# EAGLE board logic_1.0 (EAGLE 9.5.2)
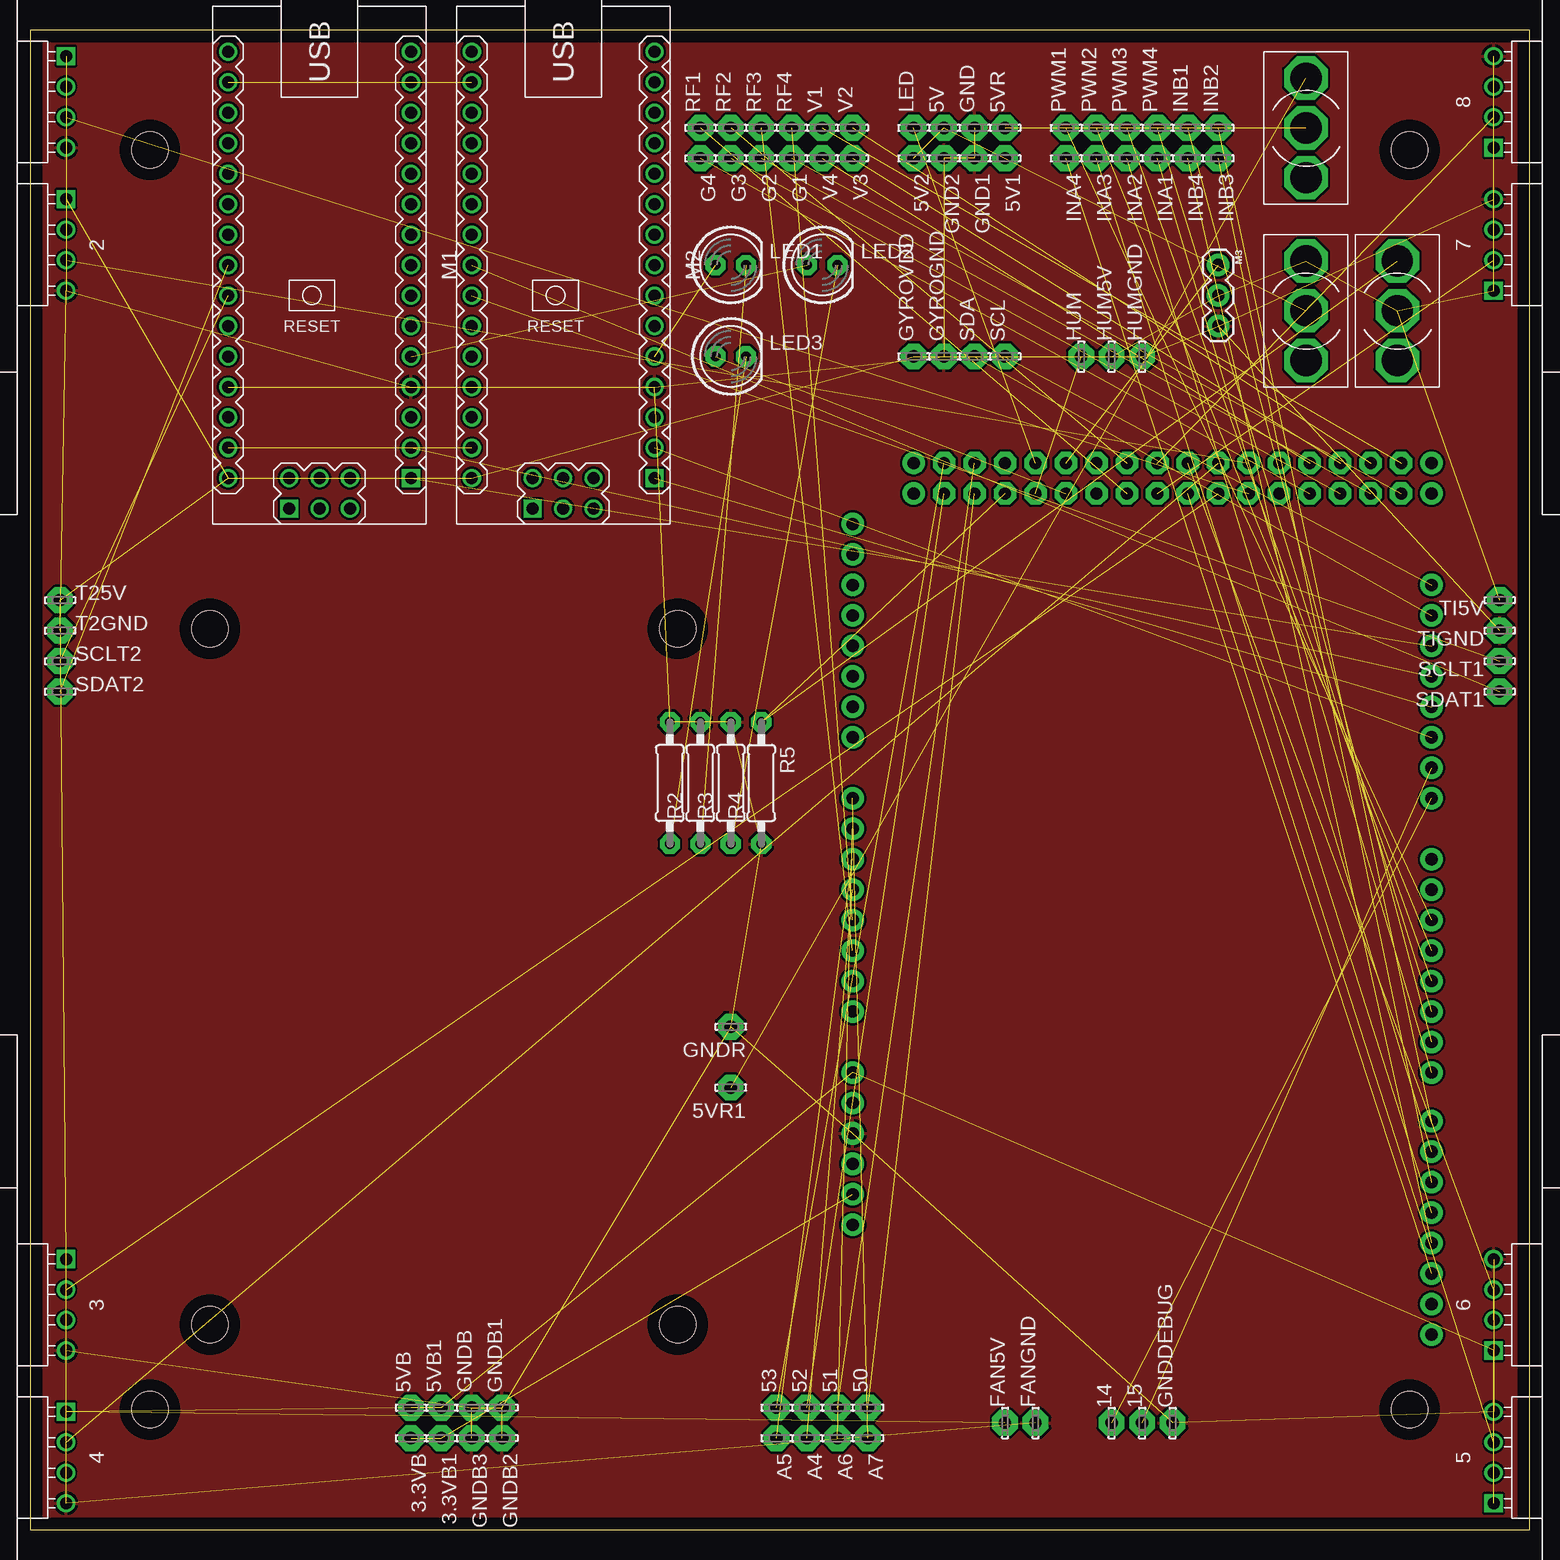
[diagram p0: board, top side]
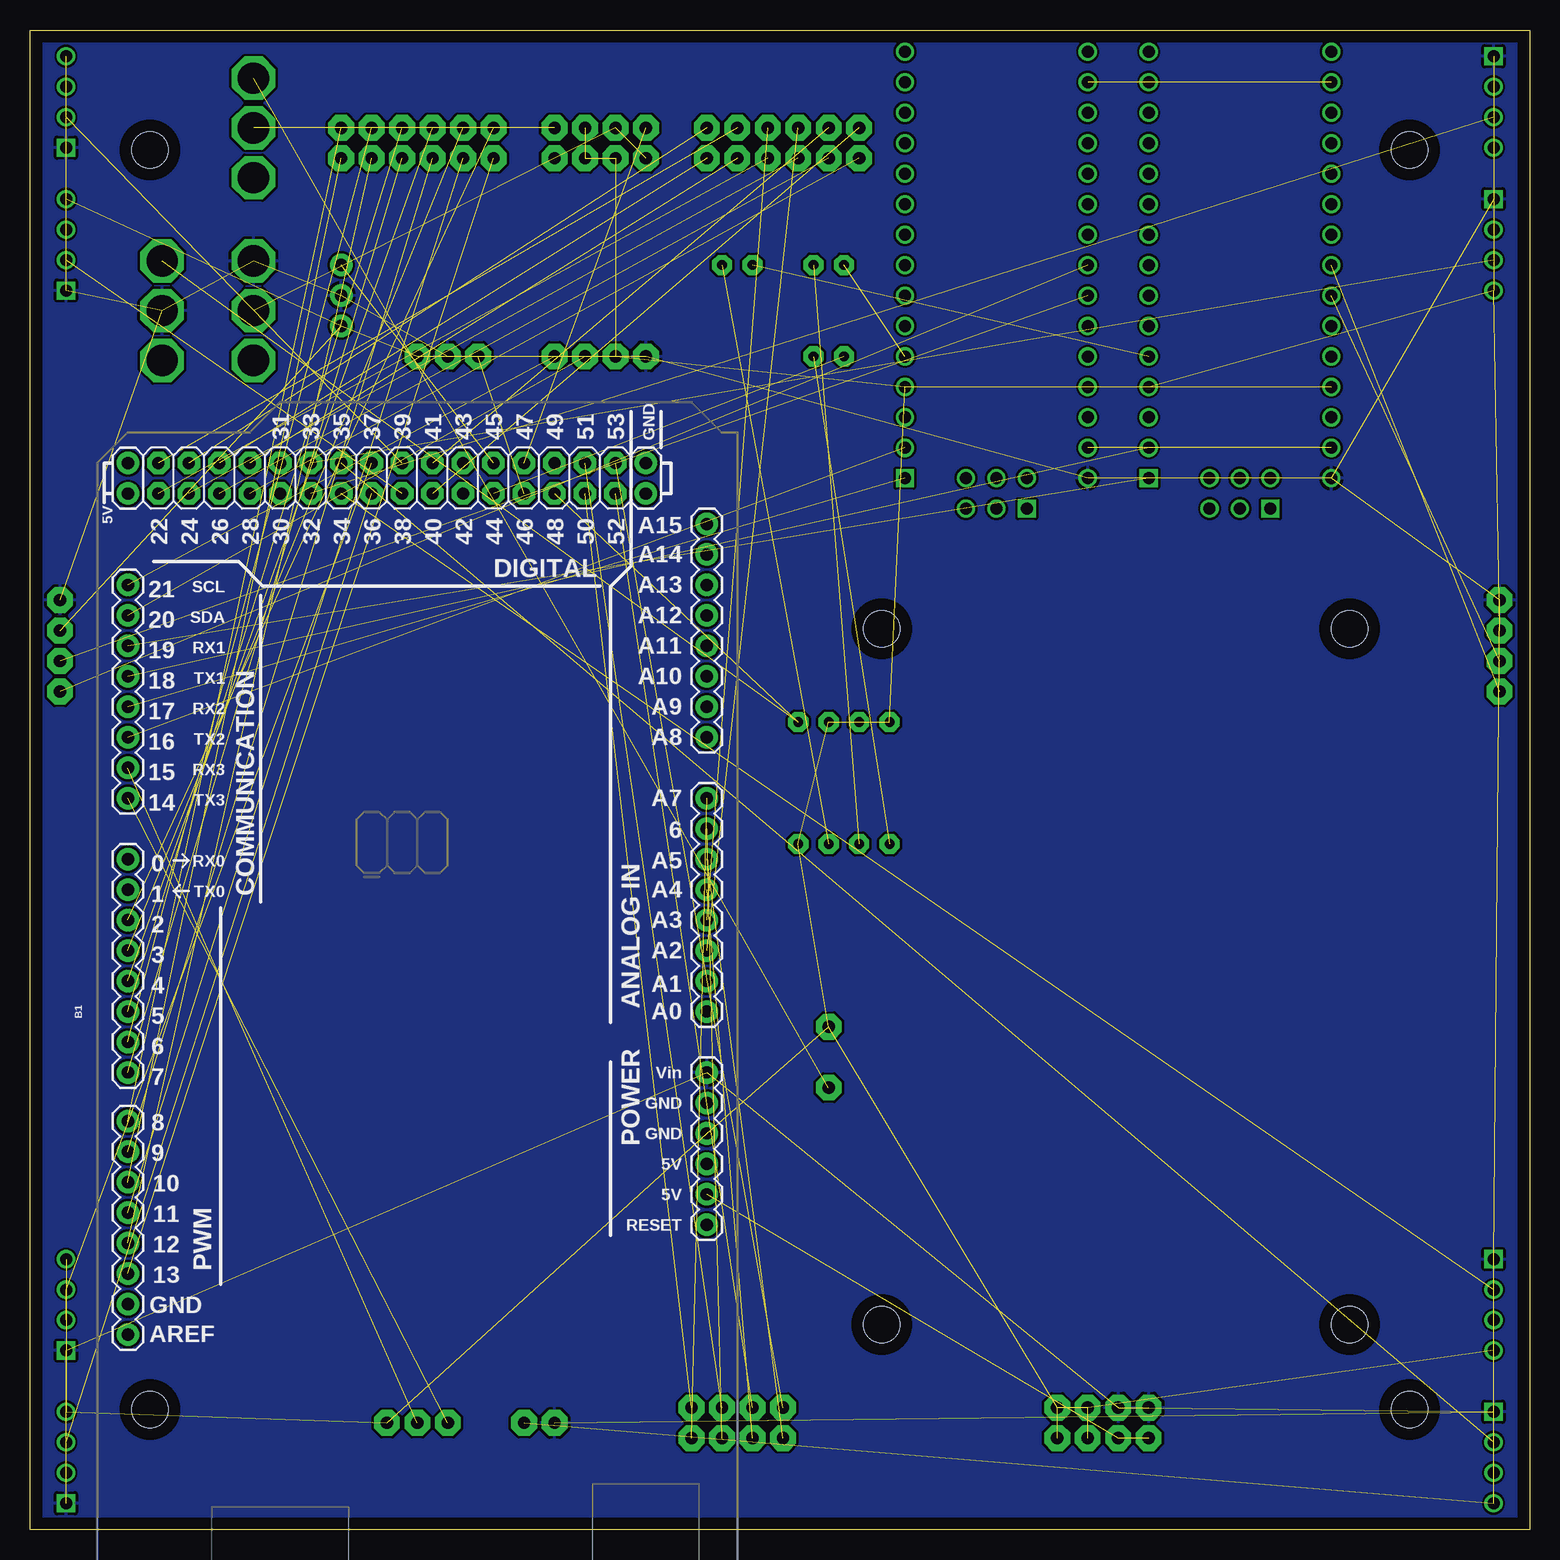
[diagram p1: board, bottom side, seen from below]

Size 125 x 125 mm. Coordinates in mm from the lower left corner, seen from the top.
Outline: 0,0 125,0 125,125 0,125 0,0
Copper layers (1*16): Top 0.035mm / dielectric 1.5mm / Bottom 0.035mm
Design rules "default": minimum track width 6mil, minimum drill 0.35mm, track to track 6mil, track to pad 6mil, pad to pad 6mil, via to via 6mil, smd to smd 6mil, copper to edge 40mil, drill to drill 6mil, minimum pad ring 10mil, minimum via ring 8mil, stop-mask expansion 4mil, vias tented up to drill 0mil, thermal gap 10mil
Net classes: 0 default: width 0.2 mm, clearance 0.2 mm; 2 New Class: width 0.7 mm
Holes 3 mm at 10,115 115,115 115,10 10,10 15,75.08 54,75.08 15,17.08 54,17.08

## Footprints (pad centres in the part's own frame; a part is rotated, then mirrored left to right if it is on the bottom)
ULTRASONIC-HC-SR04#V = drill 1 square: 1 -3.81,0 | drill 1: 2 -1.27,0; 3 1.27,0; 4 3.81,0
LSP10 = drill 1.016 pad 2.159 octagon: MP 0,0
ARDUINO_MEGA = drill 1.016 pad 1.88: 0 13.97,24.13; 1 11.43,24.13; 2 8.89,24.13; 3 6.35,24.13; 3.3V -13.97,-24.13; 4 3.81,24.13; 5 1.27,24.13; 5V@0 -11.43,-24.13; 5V@1 44.45,24.13; 5V@2 46.99,24.13; 6 -1.27,24.13; 7 -3.81,24.13; 8 -7.874,24.13; 9 -10.414,24.13; 10 -12.954,24.13; 11 -15.494,24.13; 12 -18.034,24.13; 13 -20.574,24.13; 14 19.05,24.13; 15 21.59,24.13; 16 24.13,24.13; 17 26.67,24.13; 18 29.21,24.13; 19 31.75,24.13; 20 34.29,24.13; 21 36.83,24.13; A0 1.27,-24.13; A1 3.81,-24.13; A2 6.35,-24.13; A3 8.89,-24.13; A4 11.43,-24.13; A5 13.97,-24.13; A6 16.51,-24.13; A7 19.05,-24.13; A8 24.13,-24.13; A9 26.67,-24.13; A10 29.21,-24.13; A11 31.75,-24.13; A12 34.29,-24.13; A13 36.83,-24.13; A14 39.37,-24.13; A15 41.91,-24.13; AREF -25.654,24.13; GND@0 -8.89,-24.13; GND@1 -6.35,-24.13; GND@2 44.45,-19.05; GND@3 46.99,-19.05; GND@4 -23.114,24.13; RESET -16.51,-24.13; VIN -3.81,-24.13 | drill 1.016 pad 1.88 octagon: 22 44.45,21.59; 23 46.99,21.59; 24 44.45,19.05; 25 46.99,19.05; 26 44.45,16.51; 27 46.99,16.51; 28 44.45,13.97; 29 46.99,13.97; 30 44.45,11.43; 31 46.99,11.43; 32 44.45,8.89; 33 46.99,8.89; 34 44.45,6.35; 35 46.99,6.35; 36 44.45,3.81; 37 46.99,3.81; 38 44.45,1.27; 39 46.99,1.27; 40 44.45,-1.27; 41 46.99,-1.27; 42 44.45,-3.81; 43 46.99,-3.81; 44 44.45,-6.35; 45 46.99,-6.35; 46 44.45,-8.89; 47 46.99,-8.89; 48 44.45,-11.43; 49 46.99,-11.43; 50 44.45,-13.97; 51 46.99,-13.97; 52 44.45,-16.51; 53 46.99,-16.51
LED5MM = drill 0.813 pad 1.676 octagon: A -1.27,0; K 1.27,0
ARDUINO-NANO-3.0#ISP = drill 1 square: J1.1 17.78,7.62; J4.1 20.32,-2.54 | drill 1: J1.2 15.24,7.62; J1.3 12.7,7.62; J1.4 10.16,7.62; J1.5 7.62,7.62; J1.6 5.08,7.62; J1.7 2.54,7.62; J1.8 0,7.62; J1.9 -2.54,7.62; J1.10 -5.08,7.62; J1.11 -7.62,7.62; J1.12 -10.16,7.62; J1.13 -12.7,7.62; J1.14 -15.24,7.62; J1.15 -17.78,7.62; J2.1 17.78,-7.62; J2.2 15.24,-7.62; J2.3 12.7,-7.62; J2.4 10.16,-7.62; J2.5 7.62,-7.62; J2.6 5.08,-7.62; J2.7 2.54,-7.62; J2.8 0,-7.62; J2.9 -2.54,-7.62; J2.10 -5.08,-7.62; J2.11 -7.62,-7.62; J2.12 -10.16,-7.62; J2.13 -12.7,-7.62; J2.14 -15.24,-7.62; J2.15 -17.78,-7.62; J4.2 17.78,-2.54; J4.3 20.32,0; J4.4 17.78,0; J4.5 20.32,2.54; J4.6 17.78,2.54
1X03 = drill 1.016 pad 1.88: 1 0,0; 2 2.54,0; 3 5.08,0
0207/10 = drill 0.813 pad 1.676 octagon: 1 -5.08,0; 2 5.08,0
SINGLE_SWITCH = drill 2.6 octagon: A0 2.2,3.5; A1 10.5,3.5; INT 6.35,3.5

## Placement (x,y rotation side)
1  ULTRASONIC-HC-SR04#V  [ULTRASONIC-HC-SR04#V]  3,119 270 top
2  ULTRASONIC-HC-SR04#V  [ULTRASONIC-HC-SR04#V]  3,107.09 270 top
3  ULTRASONIC-HC-SR04#V  [ULTRASONIC-HC-SR04#V]  3,18.73 270 top
3.3VB  LSP10  [LSP10]  31.75,7.62 0 top
3.3VB1  LSP10  [LSP10]  34.29,7.62 0 top
4  ULTRASONIC-HC-SR04#V  [ULTRASONIC-HC-SR04#V]  3,6 270 top
5  ULTRASONIC-HC-SR04#V  [ULTRASONIC-HC-SR04#V]  122,6 90 top
5V  LSP10  [LSP10]  76.2,116.84 0 top
5V1  LSP10  [LSP10]  81.28,114.3 0 top
5V2  LSP10  [LSP10]  73.66,114.3 0 top
5VB  LSP10  [LSP10]  31.75,10.16 0 top
5VB1  LSP10  [LSP10]  34.29,10.16 0 top
5VR  LSP10  [LSP10]  81.28,116.84 0 top
5VR1  LSP10  [LSP10]  58.42,36.83 180 top
6  ULTRASONIC-HC-SR04#V  [ULTRASONIC-HC-SR04#V]  122,18.73 90 top
7  ULTRASONIC-HC-SR04#V  [ULTRASONIC-HC-SR04#V]  122,107.09 90 top
8  ULTRASONIC-HC-SR04#V  [ULTRASONIC-HC-SR04#V]  122,119 90 top
14  LSP10  [LSP10]  90.17,8.89 90 top
15  LSP10  [LSP10]  92.71,8.89 90 top
50  LSP10  [LSP10]  69.85,10.16 0 top
51  LSP10  [LSP10]  67.31,10.16 0 top
52  LSP10  [LSP10]  64.77,10.16 0 top
53  LSP10  [LSP10]  62.23,10.16 0 top
A4  LSP10  [LSP10]  64.77,7.62 0 top
A5  LSP10  [LSP10]  62.23,7.62 0 top
A6  LSP10  [LSP10]  67.31,7.62 0 top
A7  LSP10  [LSP10]  69.85,7.62 0 top
B1  ARDUINO_MEGA_R3FULL  [ARDUINO_MEGA]  92.71,41.91 90 bottom
FAN5V  LSP10  [LSP10]  81.28,8.89 90 top
FANGND  LSP10  [LSP10]  83.82,8.89 90 top
G1  LSP10  [LSP10]  63.5,114.3 0 top
G2  LSP10  [LSP10]  60.96,114.3 0 top
G3  LSP10  [LSP10]  58.42,114.3 0 top
G4  LSP10  [LSP10]  55.88,114.3 0 top
GND  LSP10  [LSP10]  78.74,116.84 0 top
GND1  LSP10  [LSP10]  78.74,114.3 0 top
GND2  LSP10  [LSP10]  76.2,114.3 0 top
GNDB  LSP10  [LSP10]  36.83,10.16 0 top
GNDB1  LSP10  [LSP10]  39.37,10.16 0 top
GNDB2  LSP10  [LSP10]  39.37,7.62 0 top
GNDB3  LSP10  [LSP10]  36.83,7.62 0 top
GNDDEBUG  LSP10  [LSP10]  95.25,8.89 90 top
GNDR  LSP10  [LSP10]  58.42,41.91 180 top
GYROGND  LSP10  [LSP10]  76.2,97.79 0 top
GYROVDD  LSP10  [LSP10]  73.66,97.79 0 top
HUM  LSP10  [LSP10]  87.63,97.79 90 top
HUM5V  LSP10  [LSP10]  90.17,97.79 90 top
HUMGND  LSP10  [LSP10]  92.71,97.79 90 top
INA1  LSP10  [LSP10]  93.98,114.3 0 top
INA2  LSP10  [LSP10]  91.44,114.3 0 top
INA3  LSP10  [LSP10]  88.9,114.3 0 top
INA4  LSP10  [LSP10]  86.36,114.3 0 top
INB1  LSP10  [LSP10]  96.52,116.84 0 top
INB2  LSP10  [LSP10]  99.06,116.84 0 top
INB3  LSP10  [LSP10]  99.06,114.3 0 top
INB4  LSP10  [LSP10]  96.52,114.3 0 top
LED  LSP10  [LSP10]  73.66,116.84 0 top
LED1  [LED5MM]  58.42,105.41 0 top
LED2  [LED5MM]  66.04,105.41 0 top
LED3  [LED5MM]  58.42,97.79 0 top
M1  ARDUINO-NANO-3.0#ISP  [ARDUINO-NANO-3.0#ISP]  24.13,105.41 270 top
M2  ARDUINO-NANO-3.0#ISP  [ARDUINO-NANO-3.0#ISP]  44.45,105.41 270 top
M3  SERVO  [1X03]  99.06,105.41 270 top
PWM1  LSP10  [LSP10]  86.36,116.84 0 top
PWM2  LSP10  [LSP10]  88.9,116.84 0 top
PWM3  LSP10  [LSP10]  91.44,116.84 0 top
PWM4  LSP10  [LSP10]  93.98,116.84 0 top
R2  [0207/10]  53.34,62.23 90 top
R3  [0207/10]  55.88,62.23 90 top
R4  [0207/10]  58.42,62.23 90 top
R5  [0207/10]  60.96,62.23 270 top
RF1  LSP10  [LSP10]  55.88,116.84 0 top
RF2  LSP10  [LSP10]  58.42,116.84 0 top
RF3  LSP10  [LSP10]  60.96,116.84 0 top
RF4  LSP10  [LSP10]  63.5,116.84 0 top
SCL  LSP10  [LSP10]  81.28,97.79 0 top
SCLT1  LSP10  [LSP10]  122.5,72.39 0 top
SCLT2  LSP10  [LSP10]  2.5,72.39 0 top
SDA  LSP10  [LSP10]  78.74,97.79 0 top
SDAT1  LSP10  [LSP10]  122.5,69.85 0 top
SDAT2  LSP10  [LSP10]  2.5,69.85 0 top
T2GND  LSP10  [LSP10]  2.5,74.93 0 top
T25V  LSP10  [LSP10]  2.5,77.47 0 top
TI5V  LSP10  [LSP10]  122.5,77.47 0 top
TIGND  LSP10  [LSP10]  122.5,74.93 0 top
U$1  SINGE_SWITCH  [SINGLE_SWITCH]  102.87,107.95 270 top
U$2  SINGE_SWITCH  [SINGLE_SWITCH]  102.87,123.19 270 top
U$3  SINGE_SWITCH  [SINGLE_SWITCH]  110.49,107.95 270 top
V1  LSP10  [LSP10]  66.04,116.84 0 top
V2  LSP10  [LSP10]  68.58,116.84 0 top
V3  LSP10  [LSP10]  68.58,114.3 0 top
V4  LSP10  [LSP10]  66.04,114.3 0 top

## Library data of the parts
1-8 = diy-modules
3.3VB 3.3VB1 5V 5V1 5V2 5VB 5VB1 5VR 5VR1 14 15 50-53 A4-A7 FAN5V FANGND G1-G4 GND GND1 GND2 GNDB GNDB1-GNDB3 GNDDEBUG GNDR GYROGND GYROVDD HUM HUM5V HUMGND INA1-INA4 INB1-INB4 LED PWM1-PWM4 RF1-RF4 SCL SCLT1 SCLT2 SDA SDAT1 SDAT2 T2GND T25V TI5V TIGND V1-V4 = solpad
B1 = SparkFun-Boards
LED1-LED3 R2-R5 = adafruit
M1 M2 = diy-modmod
M3 = SparkFun-Electromechanical
U$1-U$3 = CdiClementina

## Nets
3V3: M1.J2.14 M2.J2.14
5V: M1.J2.4 M2.J2.4
GND: 1.4 2.4 3.4 4.4 5.4 6.4 7.4 8.4 B1.GND@0 FANGND.MP GND1.MP GND2.MP GND.MP GNDB1.MP GNDB2.MP GNDB3.MP GNDB.MP GNDDEBUG.MP GNDR.MP GYROGND.MP HUMGND.MP M1.J1.4 M2.J1.4 M3.3 R2.2 R3.2 R4.2 R5.2 T2GND.MP TIGND.MP
GND.2: M1.J2.2 M2.J2.2
N$1: 5VR1.MP U$2.A0
N$2 [New Class]: 5V1.MP 5V2.MP 5V.MP U$1.INT
N$3: B1.2 PWM1.MP
N$4: B1.16 M2.J1.2
N$5: B1.17 M2.J1.1
N$6: B1.18 M1.J1.2
N$7: B1.19 M1.J1.1
N$8: 1.2 1.3 B1.32
N$9: 2.2 2.3 B1.33
N$10: 3.2 3.3 B1.34
N$11: 4.2 4.3 B1.35
N$12: 5.2 5.3 B1.36
N$13: 6.2 6.3 B1.37
N$14: 7.2 7.3 B1.38
N$15: 8.2 8.3 B1.39
N$18: B1.45 M3.1
N$19: 1.1 2.1 3.1 4.1 5.1 5VB1.MP 5VB.MP 6.1 7.1 8.1 B1.VIN FAN5V.MP GYROVDD.MP HUM5V.MP M1.J2.1 M2.J2.1 M3.2 T25V.MP TI5V.MP U$1.A0 U$3.INT
N$22: B1.3 PWM2.MP
N$23: B1.4 PWM3.MP
N$24: B1.5 PWM4.MP
N$25: B1.6 INB1.MP
N$26: B1.7 INA1.MP
N$27: B1.8 INB2.MP
N$28: B1.9 INA2.MP
N$29: B1.10 INB3.MP
N$30: B1.11 INA3.MP
N$31: B1.12 INB4.MP
N$32: B1.13 INA4.MP
N$33: B1.22 G1.MP
N$34: B1.23 V1.MP
N$35: B1.24 G2.MP
N$36: B1.25 V2.MP
N$37: B1.26 G3.MP
N$38: B1.27 V3.MP
N$39: B1.28 G4.MP
N$40: B1.29 V4.MP
N$41: B1.20 SDA.MP
N$42: B1.21 SCL.MP
N$43: B1.46 HUM.MP
N$44: B1.47 LED.MP
N$45: 3.3VB1.MP 3.3VB.MP B1.3.3V
N$46: M2.J2.8 SDAT1.MP
N$47: M2.J2.7 SCLT1.MP
N$48: M1.J2.8 SDAT2.MP
N$49: M1.J2.7 SCLT2.MP
N$50: B1.40 RF1.MP
N$51: B1.44 LED3.A
N$52: B1.41 RF2.MP
N$53 [New Class]: 5VR.MP U$2.INT
N$54: B1.A2 RF3.MP
N$55: B1.A3 RF4.MP
N$56: LED1.A M2.J1.5
N$57: LED2.A M1.J1.5
N$61: LED3.K R2.1
N$62: LED2.K R4.1
N$63: LED1.K R3.1
N$68: 50.MP B1.50
N$69: 51.MP B1.51
N$70: 52.MP B1.52
N$71: A6.MP B1.A6
N$72: A7.MP B1.A7
N$73: A4.MP B1.A4
N$74: A5.MP B1.A5
N$75: 53.MP B1.53
N$80: B1.48 R5.1 U$3.A0
N$81: 14.MP B1.14
N$82: 15.MP B1.15

## Tracks (layer width: path | path; a pad name or v marks a point on that pad's centre or on a via)
3V3  (1 unrouted)
5V  (1 unrouted)
GND  (29 unrouted)
  pour Top: -44.45,154.94 176.53,154.94 189.23,142.24 189.23,-15.24 179.07,-25.4 -44.45,-25.4 -48.26,-21.59 -48.26,151.13
GND.2  (1 unrouted)
N$1  (1 unrouted)
N$2  (3 unrouted)
N$3  (1 unrouted)
N$4  (1 unrouted)
N$5  (1 unrouted)
N$6  (1 unrouted)
N$7  (1 unrouted)
N$8  (2 unrouted)
N$9  (2 unrouted)
N$10  (2 unrouted)
N$11  (2 unrouted)
N$12  (2 unrouted)
N$13  (2 unrouted)
N$14  (2 unrouted)
N$15  (2 unrouted)
N$18  (1 unrouted)
N$19  (20 unrouted)
  pour Bottom: -73.66,181.61 217.17,181.61 217.17,-58.42 200.66,-74.93 -128.27,-74.93 -158.75,-44.45 -158.75,96.52 -74.93,180.34
N$22  (1 unrouted)
N$23  (1 unrouted)
N$24  (1 unrouted)
N$25  (1 unrouted)
N$26  (1 unrouted)
N$27  (1 unrouted)
N$28  (1 unrouted)
N$29  (1 unrouted)
N$30  (1 unrouted)
N$31  (1 unrouted)
N$32  (1 unrouted)
N$33  (1 unrouted)
N$34  (1 unrouted)
N$35  (1 unrouted)
N$36  (1 unrouted)
N$37  (1 unrouted)
N$38  (1 unrouted)
N$39  (1 unrouted)
N$40  (1 unrouted)
N$41  (1 unrouted)
N$42  (1 unrouted)
N$43  (1 unrouted)
N$44  (1 unrouted)
N$45  (2 unrouted)
N$46  (1 unrouted)
N$47  (1 unrouted)
N$48  (1 unrouted)
N$49  (1 unrouted)
N$50  (1 unrouted)
N$51  (1 unrouted)
N$52  (1 unrouted)
N$53  (1 unrouted)
N$54  (1 unrouted)
N$55  (1 unrouted)
N$56  (1 unrouted)
N$57  (1 unrouted)
N$61  (1 unrouted)
N$62  (1 unrouted)
N$63  (1 unrouted)
N$68  (1 unrouted)
N$69  (1 unrouted)
N$70  (1 unrouted)
N$71  (1 unrouted)
N$72  (1 unrouted)
N$73  (1 unrouted)
N$74  (1 unrouted)
N$75  (1 unrouted)
N$80  (2 unrouted)
N$81  (1 unrouted)
N$82  (1 unrouted)